# Altium PCB MSP430_PCB.PcbDoc
Units mm, origin at the board's own origin, x right, y up, seen from the top; angles counter-clockwise.
Board outline 70 x 50 mm, 2 copper layers (Top Layer, Bottom Layer), stack 1.671 mm thick; 20 components, 12 nets, 148 pads, 24 vias.
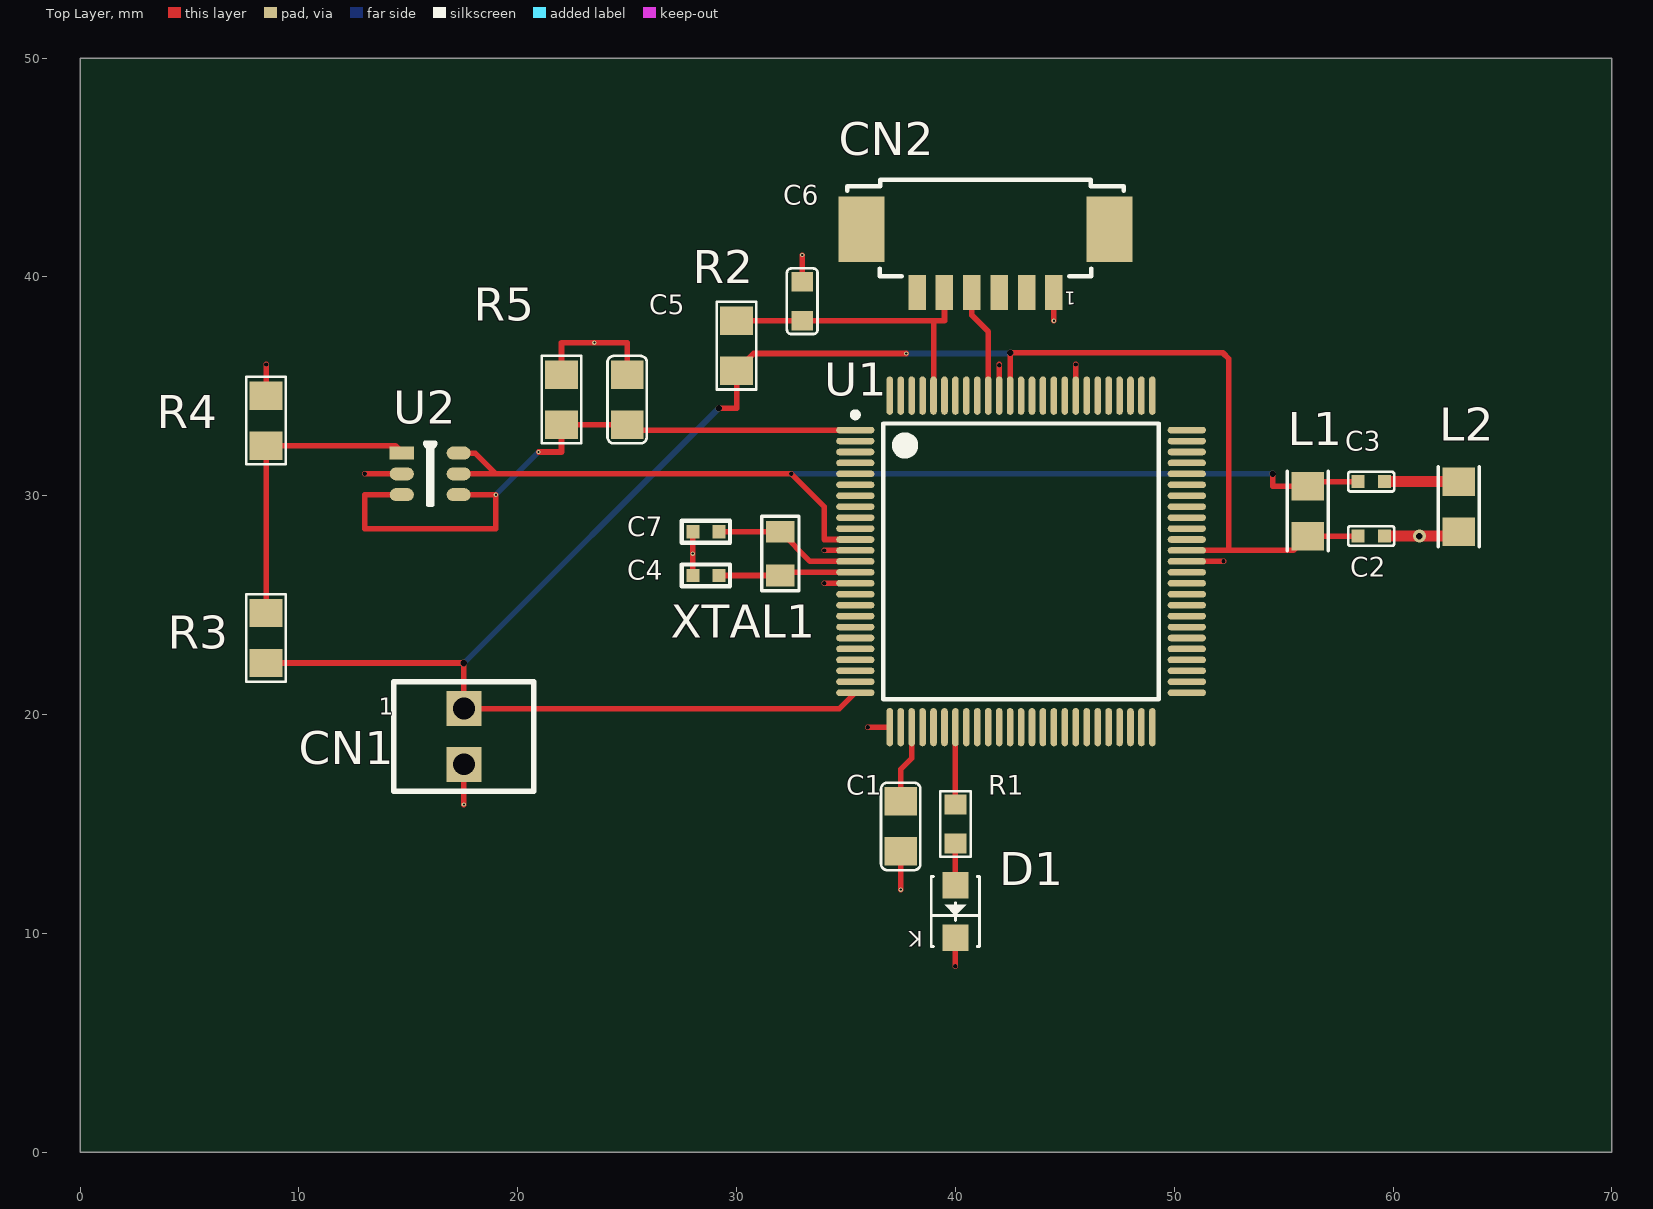
[diagram p0: Top Layer view]
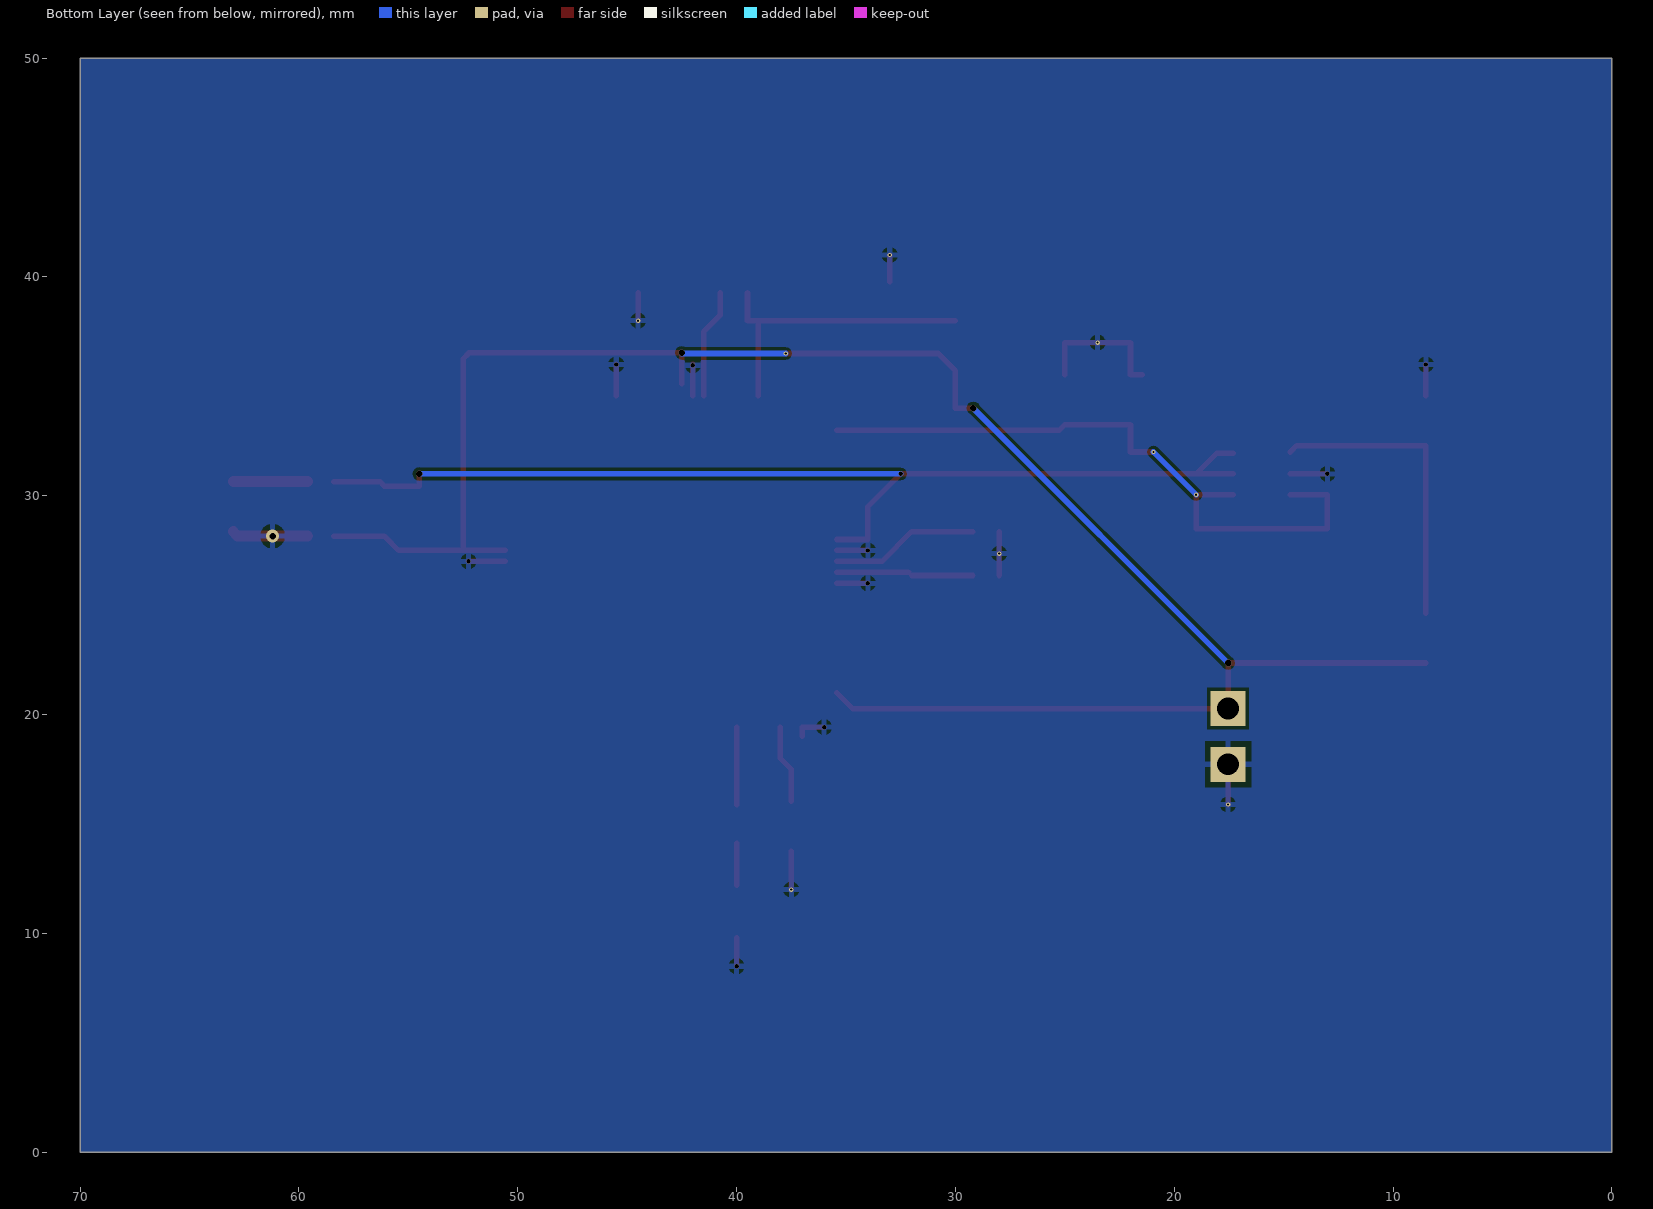
[diagram p1: Bottom Layer view, seen from below]
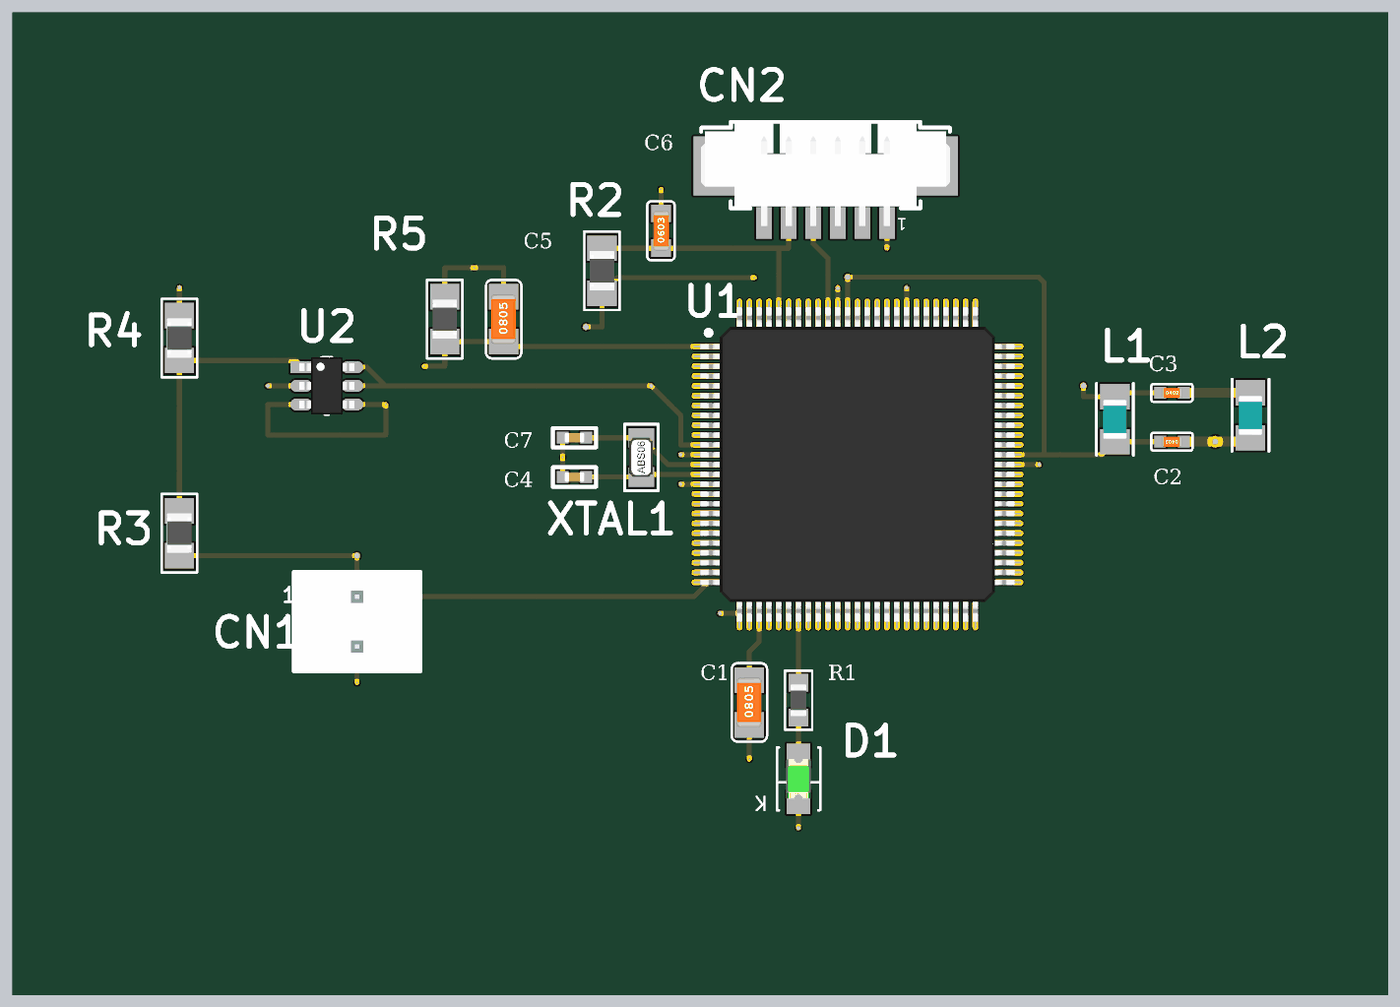
[diagram p2: 3D render of the assembled board from above, using the file's embedded part models]

## Layer stack, top to bottom
Top Solder: solder mask 0.0102, Solder Resist, Dk 3.5
Top Layer: signal copper 0.0356
Dielectric 1: dielectric 1.6, FR-4, Dk 4.8
Bottom Layer: signal copper 0.0356
Bottom Solder: solder mask 0.0102, Solder Resist, Dk 3.5

## Board outline
0,0 70,0 70,50 0,50

## Design rules (kind name [scope] priority, off if disabled: settings)
Clearance [All] p1: gap=0.15 ignorepadtopadclearanceinfootprint=FALSE
MinimumSolderMaskSliver [All] p1: minsoldermaskwidth=0.03
NetAntennae [InNet('No Net')] p1: netantennaetolerance=0
PolygonConnect [All] p1: connectstyle=Relief reliefconductorwidth=0.254 reliefentries=4 polygonreliefangle="90 Angle" airgapwidth=0.254
RoutingVias [All] p1: holewidth=0.1 width=0.2 viastyle="Through Hole" minholewidth=0.1 minwidth=0.2 maxholewidth=0.6 maxwidth=0.6
SilkToSolderMaskClearance [IsPad] p1: minsilkscreentomaskgap=0.01 clearancetoexposedcopper=TRUE
SolderMaskExpansion [All] p1: expansion=0.102
UnRoutedNet [All] p1: checkbadconnections=TRUE
Width [All] p1: maxlimit=1 minlimit=0.2 preferedwidth=0.254
26 further rules are at their usual default settings.

## Components (designator, comment, footprint, x,y, rotation, side; value= is the part's Value field where it differs from the comment)
C1 "0.47uF/50V" C0805_MD 37.5,14.889 r90 top
C2 "2.2nF" C0402_MD 59,28.157 r180 top value=Value
C3 "2.2nF" C0402_MD 59,30.643 r0 top value=Value
C4 "12pF" "Capacitor 12 pF" 28.6,26.357 r0 top
C5 "0.1uF/25V" C0805_MD 25,34.393 r90 top
C6 "1nF/16V" C0603_MD 33,38.889 r90 top
C7 "12pF" "Capacitor 12 pF" 28.6,28.357 r0 top
CN1 "Header 2" "HEADER 2M 2.54mm 180 GRAUS" 17.541,19 r270 top
CN2 "Header 6H_PicoBlade" "PICO BLADE 0532610671" 41.375,40.736 r180 top
D1 "Comment" "L0805 GREEN" 40,11 r90 top
L1 "30R@100Mhz, 3A" L0805 56.1,29.3 r90 top
L2 "30R@100Mhz, 3A" L0805 63,29.5 r90 top
R1 "330" R0603_MD 40,15 r90 top
R2 "47K" R0805_MD 30,36.857 r90 top value=Value
R3 "47K" R0805_MD 8.5,23.5 r90 top value=Value
R4 "47K" R0805_MD 8.5,33.432 r90 top value=Value
R5 "1.65K" R0805_MD 22,34.393 r270 top
U1 "Comment" PZ0100A_N 43,27 r0 top
U2 "TLV341AIDBVR" "SOT-23 6L" 16,31 r0 top
XTAL1 "32.768kHz 12.5pF" "ABS06 0805" 32,27.357 r90 top

## Footprints (in the part's own frame and the unit in brackets; to place one, negate y for a bottom-side part, rotate by r counter-clockwise, add the part's x,y. Pads: shape width x height; smd on the part's side, far side on the other; paste and mask are expansions set on the pad)
"ABS06 0805" [mm]
  rect 1x1.3 smd: 1(-1,0) 2(1,0)
  silkscreen extent -1.7,-0.85 1.7,0.85, body extent -1,-0.6 1,0.62, height 0.6
C0402_MD [mm] "Chip Capacitor, Body 1.0x0.5mm, IPC Medium Density"
  rect 0.6x0.6 smd: 1(-0.6,0) 2(0.6,0)
  silkscreen extent -1.05,-0.45 1.05,0.45, body extent -0.51,-0.25 0.51,0.25, height 0.51
C0603_MD [mm] "Chip Capacitor, Body 1.6x0.8mm, IPC Medium Density"
  rect 0.9x1 smd: 1(-0.889,0) 2(0.889,0)
  silkscreen extent -1.5,-0.7 1.5,0.7, body extent -1,-0.41 1,0.38, height 0.79
C0805_MD [mm] "Chip Capacitor, Body 2.0x1.3mm, IPC Medium Density"
  rect 1.3x1.5 smd: 1(-1.143,0) 2(1.143,0)
  silkscreen extent -2,-0.9 2,0.9, body extent -1.25,-0.61 1.25,0.64, height 0.79
"Capacitor 12 pF" [mm]
  rect 0.6x0.6 smd: 1(-0.6,0) 2(0.6,0)
  silkscreen extent -1.1,-0.5 1.1,0.5, body extent -0.5,-0.25 0.5,0.25, height 0.51
"HEADER 2M 2.54mm 180 GRAUS" [mm] "HEADER 3M 2.54mm 180 GRAUS"
  rect 1.6x1.6 hole 1: 1(-1.27,0) 2(1.27,0)
  silkscreen extent -2.5,-3.2 2.5,3.2, body extent -2.54,-3.25 2.54,3.1, height 10.68
L0805 [mm]
  rect 1.3x1.5 smd: 1(-1.143,0) 2(1.143,0)
  silkscreen extent -1.83,-0.94 1.83,0.94, body extent -1,-0.6 1,0.6, height 0.95
"L0805 GREEN" [mm]
  rect 1.2x1.2 smd paste+0: A(1.2,0) K(-1.2,0)
  silkscreen extent -1.6,-1.1 1.6,1.1, body extent -1.01,-0.62 1.01,0.63, height 1.1
"PICO BLADE 0532610671" [mm]
  rect 2.1x3 smd: 0(-5.675,-1.45) 0(5.675,-1.45)
  rect 0.8x1.6 smd: 1(-3.125,1.45) 2(-1.875,1.45) 3(-0.625,1.45) 4(0.625,1.45) 5(1.875,1.45) 6(3.125,1.45)
  silkscreen extent -6.33,-3.7 6.32,0.7, body extent -6.32,-3.6 6.33,1.6, height 3.5
PZ0100A_N [mm]
  oval 1.75x0.3 smd paste-0.102 mask+0.051: 1(-7.575,6) 2(-7.575,5.5) 3(-7.575,5) 4(-7.575,4.5) 5(-7.575,4) 6(-7.575,3.5) 7(-7.575,3) 8(-7.575,2.5) 9(-7.575,2) 10(-7.575,1.5) 11(-7.575,1) 12(-7.575,0.5) 13(-7.575,0) 14(-7.575,-0.5) 15(-7.575,-1) 16(-7.575,-1.5) 17(-7.575,-2) 18(-7.575,-2.5) 19(-7.575,-3) 20(-7.575,-3.5) 21(-7.575,-4) 22(-7.575,-4.5) 23(-7.575,-5) 24(-7.575,-5.5) 25(-7.575,-6) 51(7.575,-6) 52(7.575,-5.5) 53(7.575,-5) 54(7.575,-4.5) 55(7.575,-4) 56(7.575,-3.5) 57(7.575,-3) 58(7.575,-2.5) 59(7.575,-2) 60(7.575,-1.5) 61(7.575,-1) 62(7.575,-0.5) 63(7.575,0) 64(7.575,0.5) 65(7.575,1) 66(7.575,1.5) 67(7.575,2) 68(7.575,2.5) 69(7.575,3) 70(7.575,3.5) 71(7.575,4) 72(7.575,4.5) 73(7.575,5) 74(7.575,5.5) 75(7.575,6)
  oval 0.3x1.75 smd paste-0.102 mask+0.051: 26(-6,-7.575) 27(-5.5,-7.575) 28(-5,-7.575) 29(-4.5,-7.575) 30(-4,-7.575) 31(-3.5,-7.575) 32(-3,-7.575) 33(-2.5,-7.575) 34(-2,-7.575) 35(-1.5,-7.575) 36(-1,-7.575) 37(-0.5,-7.575) 38(0,-7.575) 39(0.5,-7.575) 40(1,-7.575) 41(1.5,-7.575) 42(2,-7.575) 43(2.5,-7.575) 44(3,-7.575) 45(3.5,-7.575) 46(4,-7.575) 47(4.5,-7.575) 48(5,-7.575) 49(5.5,-7.575) 50(6,-7.575) 76(6,7.575) 77(5.5,7.575) 78(5,7.575) 79(4.5,7.575) 80(4,7.575) 81(3.5,7.575) 82(3,7.575) 83(2.5,7.575) 84(2,7.575) 85(1.5,7.575) 86(1,7.575) 87(0.5,7.575) 88(0,7.575) 89(-0.5,7.575) 90(-1,7.575) 91(-1.5,7.575) 92(-2,7.575) 93(-2.5,7.575) 94(-3,7.575) 95(-3.5,7.575) 96(-4,7.575) 97(-4.5,7.575) 98(-5,7.575) 99(-5.5,7.575) 100(-6,7.575)
  silkscreen extent -7.7,-6.3 6.3,6.82, body extent -8,-8 8,8, height 1.46
R0603_MD [mm] "Chip Resistor, Body 1.6x0.8mm, IPC Medium Density"
  rect 0.9x1 smd: 1(-0.889,0) 2(0.889,0)
  silkscreen extent -1.5,-0.7 1.5,0.7, body extent -0.8,-0.4 0.8,0.4, height 0.37
R0805_MD [mm] "Chip Resistor, Body 2.0x1.3mm, IPC Medium Density"
  rect 1.3x1.5 smd: 1(-1.143,0) 2(1.143,0)
  silkscreen extent -2,-0.9 2,0.9, body extent -1,-0.62 1,0.63, height 0.47
"SOT-23 6L" [mm]
  rect 1.1x0.6 smd: 1(-1.3,0.95)
  oval 1.1x0.6 smd: 2(-1.3,0) 3(-1.3,-0.95) 4(1.3,-0.95) 5(1.3,0) 6(1.3,0.95)
  silkscreen extent -0.24,-1.43 0.24,1.43, body extent -1.4,-1.45 1.4,1.45, height 1.45

## Part data
C1: library part Cap_Cer_X7R_0.47uF_50V_0805, "CAP CER 0.47UF 50V 10% X7R 0805", Partnumber=C0805C474K5RACTU, NCM=8532.24.10
C2 C3: library part "Cap 2.2nF/16V_0402", "Imported", Case/Package=0402, Case Code (Metric)=1005, Dielectric=X7R, Manufacturer=Murata, Manufacturer_Part_Number=GRM155R71C222KA01D, Max Operating Temperature=125°C, Min Operating Temperature=-55°C, Package Quantity=10000, Supplier Part Number 1=490-6330-1-ND, Tolerance=10%, Voltage Rating=16V, Built_By=EMA_UL_Team, C="Copyright (C) 2015 Accelerated Designs. All rights reserved", Capacitance=2.2nF, Case Code (Imperial)=0402, ComponentLink1Description=https://datasheet.ciiva.com/5412/product-5412216.pdf, ComponentLink1URL=https://datasheet.ciiva.com/5412/product-5412216.pdf, ComponentLink2Description=https://datasheet.ciiva.com/6263/partnumbering-e-01-6263624.pdf, ComponentLink2URL=https://datasheet.ciiva.com/6263/partnumbering-e-01-6263624.pdf, ComponentLink3Description=https://datasheet.ciiva.com/6263/partnumbering-e-01-6263627.pdf, ComponentLink3URL=https://datasheet.ciiva.com/6263/partnumbering-e-01-6263627.pdf, ComponentLink4Description=https://datasheet.ciiva.com/17453/product-17453067.pdf, ComponentLink4URL=https://datasheet.ciiva.com/17453/product-17453067.pdf, ComponentLink5Description=https://datasheet.ciiva.com/11620/product-11620860.pdf, ComponentLink5URL=https://datasheet.ciiva.com/11620/product-11620860.pdf, ComponentLink6Description=https://datasheet.ciiva.com/6263/partnumbering-e-01-6263630.pdf, ComponentLink6URL=https://datasheet.ciiva.com/6263/partnumbering-e-01-6263630.pdf, Depth=0.5mm, Height=0.5mm, Lead Free="Lead Free", Length=1mm, Manufacturer Part Number=GRM155R71C222KA01D, Mount="Surface Mount", Packaging="Tape and Reel", Pricing 1="1=0.1, 10=0.03, 100=0.0134, 500=0.0096, 1000=0.0075, 2500=0.0068, 5000=0.0063 (USD)", Radiation Hardening=No, RefDes=RefDes, Stock 1=125973, Supplier 1=Digi-Key, Termination=SMD/SMT, Thickness=0.022inch, Type=DEV, Vendor=Murata, Voltage Rating (DC)=16V, Width=0.02inch
C4 C7: library part "Capacitor 12pF", "Multilayer Ceramic Capacitors MLCC - SMD/SMT 0402 12pF 200V C0G 5% HI FREQ", Case/Package=0402, Case Code (Metric)=1005, Dielectric=C0G, Manufacturer="Vishay Vitramon", Manufacturer Part Number=VJ0402D120JXCAJ, Max Operating Temperature=125°C, Min Operating Temperature=-55°C, Package Quantity=1, Supplier Part Number 1=720-1278-2-ND, Temperature Coefficient=30ppm/°C, Tolerance=5%, Voltage=200V, Capacitance=12pF, Case Code (Imperial)=0402, Category=Capacitors, ComponentLink1Description=http://www1.futureelectronics.com/doc/VISHAY/VJ0402DSeries.pdf?src-supplier=Future+Electronics, ComponentLink1URL=http://www1.futureelectronics.com/doc/VISHAY/VJ0402DSeries.pdf?src-supplier=Future+Electronics, ComponentLink2Description=http://www.vishay.com/docs/45071/vjhifreq.pdf?src-supplier=Digi-Key, ComponentLink2URL=http://www.vishay.com/docs/45071/vjhifreq.pdf?src-supplier=Digi-Key, ComponentLink3Description=http://www.farnell.com/datasheets/2050006.pdf?src-supplier=Element14, ComponentLink3URL=http://www.farnell.com/datasheets/2050006.pdf?src-supplier=Element14, ComponentLink4Description=http://www.farnell.com/datasheets/1631376.pdf?src-supplier=Element14, ComponentLink4URL=http://www.farnell.com/datasheets/1631376.pdf?src-supplier=Element14, Depth=0.51mm, Height=0.61mm, Lead Free="Lead Free", Length=1.02mm, Mount="Surface Mount", Packaging="Tape and Reel", Pricing 1="1000=0.13129, 2000=0.12357 (USD)", Radiation Hardening=No, REACH SVHC=Unknown, Stock 1=2000, Supplier 1=Digi-Key, Termination=SMD/SMT, Thickness=0.024inch, Voltage Rating=200V, Voltage Rating (DC)=200V, Width=0.02inch
C5: library part Cap_Cer_X7R_0.1uF_25V_0805, "CAP CER 0.1UF 25V 10% X7R 0805", Partnumber=CC0805KRX7R8BB104, NCM=8532.24.10
C6: library part Cap_Cer_X7R_1nF_16V_0603, "CAP CER 1nF 16V 0603 5%", Partnumber=C0603X102J4RECAUTO, NCM=8532.24.10
CN1: "Header, 2-Pin", Partnumber=826646-2, LatestRevisionDate=17-Jul-2002, LatestRevisionNote="Re-released for DXP Platform.", Publisher="Altium Limited"
CN2: "Header, 6-Pin, Right Angle", Partnumber=53398-0671, LatestRevisionDate=17-Jul-2002, LatestRevisionNote="Re-released for DXP Platform.", Publisher="Altium Limited"
L1 L2: library part FB_30R_3A_100MHz_0805, "Ferrite Bead 30 OHM 3A 100MHz", Partnumber=BLM21PG300SN1D, NCM=8504.50.00
R1: library part "Resistor 330", Case/Package=0603, Case Code (Metric)=1608, Manufacturer=Vishay, Manufacturer Part Number=CRCW0603330RFKEAHP, Max Operating Temperature=155°C, Max Power Dissipation=250mW, Min Operating Temperature=-55°C, Package Quantity=1, Resistance=330R, Supplier Part Number 1=541-330SCT-ND, Temperature Coefficient=100ppm/°C, Tolerance=1%, Voltage Rating=75V, Case Code (Imperial)=0603, ComponentLink1Description=https://datasheet.ciiva.com/48524/crcwhpe3-48524918.pdf, ComponentLink1URL=https://datasheet.ciiva.com/48524/crcwhpe3-48524918.pdf, ComponentLink2Description=https://datasheet.ciiva.com/8944/crcwhpe3-8944983.pdf, ComponentLink2URL=https://datasheet.ciiva.com/8944/crcwhpe3-8944983.pdf, ComponentLink3Description=https://datasheet.ciiva.com/6551/crcwhpe3-6551640.pdf, ComponentLink3URL=https://datasheet.ciiva.com/6551/crcwhpe3-6551640.pdf, ComponentLink4Description=https://datasheet.ciiva.com/6551/crcwhpe3-6551641.pdf, ComponentLink4URL=https://datasheet.ciiva.com/6551/crcwhpe3-6551641.pdf, ComponentLink5Description=https://datasheet.ciiva.com/6551/crcwhpe3-6551644.pdf, ComponentLink5URL=https://datasheet.ciiva.com/6551/crcwhpe3-6551644.pdf, ComponentLink6Description=https://datasheet.ciiva.com/16884/crcwhpe3-16884876.pdf, ComponentLink6URL=https://datasheet.ciiva.com/16884/crcwhpe3-16884876.pdf, ComponentLink7Description=https://datasheet.ciiva.com/12664/crcwhpe3-46056-12664527.pdf, ComponentLink7URL=https://datasheet.ciiva.com/12664/crcwhpe3-46056-12664527.pdf, Composition="Thick Film", Contact Plating=Tin, Depth=0.85mm, Height=0.45mm, Lead Free="Lead Free", Length=1.6mm, Military Standard=Not, Mount="Surface Mount", Number of Terminations=2, Packaging="Tape and Reel", Power Rating=250mW, Pricing 1="1=0.18, 10=0.156, 100=0.0609, 1000=0.0255, 2500=0.0234 (USD)", Radiation Hardening=No, REACH SVHC=Unknown, Stock 1=0, Supplier 1=Digi-Key, Termination=SMD/SMT, Voltage Rating (DC)=75V, Weight=7.1E-05oz, Width=0.033inch
R2 R3 R4: library part "Resistor 47 Kohms", "Imported", Case/Package=0805, Case Code (Metric)=2012, Manufacturer="Panasonic ECG", Manufacturer_Part_Number=ERA-6AEB473V, Max Operating Temperature=155°C, Max Power Dissipation=125mW, Min Operating Temperature=-55°C, Package Quantity=1, Resistance=47kR, Supplier Part Number 1=P47KDACT-ND, Temperature Coefficient=25ppm/°C, Tolerance=0.1%, Voltage Rating=100V, Built_By=EMA_UL_Team, C="Copyright (C) 2015 Accelerated Designs. All rights reserved", Case Code (Imperial)=0805, ComponentLink1Description=https://datasheet.ciiva.com/6138/485442-6138021.pdf, ComponentLink1URL=https://datasheet.ciiva.com/6138/485442-6138021.pdf, ComponentLink2Description=https://datasheet.ciiva.com/16759/70068849-16759926.pdf, ComponentLink2URL=https://datasheet.ciiva.com/16759/70068849-16759926.pdf, ComponentLink3Description=https://datasheet.ciiva.com/22740/485442-22740326.pdf, ComponentLink3URL=https://datasheet.ciiva.com/22740/485442-22740326.pdf, ComponentLink4Description=https://datasheet.ciiva.com/30061/54aoa0000ce26-30061799.pdf, ComponentLink4URL=https://datasheet.ciiva.com/30061/54aoa0000ce26-30061799.pdf, ComponentLink5Description=https://datasheet.ciiva.com/11812/0900766b80beefcc-11812472.pdf, ComponentLink5URL=https://datasheet.ciiva.com/11812/0900766b80beefcc-11812472.pdf, ComponentLink6Description=https://datasheet.ciiva.com/7802/485442-7802329.pdf, ComponentLink6URL=https://datasheet.ciiva.com/7802/485442-7802329.pdf, ComponentLink7Description=https://datasheet.ciiva.com/16774/70068849-16774537.pdf, ComponentLink7URL=https://datasheet.ciiva.com/16774/70068849-16774537.pdf, ComponentLink8Description=https://datasheet.ciiva.com/48425/era-eng-tds-48425610.pdf, ComponentLink8URL=https://datasheet.ciiva.com/48425/era-eng-tds-48425610.pdf, ComponentLink9Description=https://datasheet.ciiva.com/17209/aoa0000ce26-17209676.pdf, ComponentLink9URL=https://datasheet.ciiva.com/17209/aoa0000ce26-17209676.pdf, ComponentLink10Description=https://datasheet.ciiva.com/43455/485442-43455277.pdf, ComponentLink10URL=https://datasheet.ciiva.com/43455/485442-43455277.pdf, ComponentLink11Description=https://datasheet.ciiva.com/48530/era-eng-tds-48530030.pdf, ComponentLink11URL=https://datasheet.ciiva.com/48530/era-eng-tds-48530030.pdf, ComponentLink12Description=https://datasheet.ciiva.com/26335/453548-da-01-en-widerstand-0805-era-26335717.pdf, ComponentLink12URL=https://datasheet.ciiva.com/26335/453548-da-01-en-widerstand-0805-era-26335717.pdf, Composition="Metal Film,Thin Film", Contact Plating=Tin, Depth=1.25mm, Height=0.5mm, Lead Free="Lead Free", Length=2mm, Manufacturer Part Number=ERA-6AEB473V, Military Standard=Not, Mount="Surface Mount", Number of Pins=2, Number of Terminations=2, Packaging="Tape and Reel", Power Rating=125mW, Pricing 1="1=0.36, 10=0.302, 100=0.1182, 1000=0.0495, 2500=0.0454 (USD)", Radiation Hardening=No, REACH SVHC="No SVHC", RefDes=RefDes, Stock 1=186891, Supplier 1=Digi-Key, Termination=SMD/SMT, Type=DEV, Vendor=Panasonic, Voltage Rating (DC)=100V, Weight=0.000194oz, Width=1.25mm
R5: library part R1.65K_1%_1/10W_0805, "RES 1.65K OHM 1/10W 0.1% 0805", Partnumber=PCF0805R-1K65BT1, NCM=8533.21.20
U2: Supplier Part Number 1=296-17680-6-ND, Partnumber=TLV341AIDBVR, Supplier 1=Digi-Key
XTAL1: library part Xtal_32.768kHz_12pF_2_SMD, "32.768kHz ±20ppm Crystal 12.5pF 70 kOhm -40°C ~ 125°C", Partnumber=ECS-.327-12.5-34S-TR, NCM=8541.60.10

## Via types
v1: diameter 0.2, hole 0.2, Top Layer to Bottom Layer, 10 vias
v2: diameter 0.2, hole 0.1, Top Layer to Bottom Layer, 9 vias
v3: diameter 0.3, hole 0.3, Top Layer to Bottom Layer, 4 vias
v4: diameter 0.6, hole 0.3, Top Layer to Bottom Layer, 1 vias

## Nets (pads, with @x,y where several pads share a name; then routed paths per layer and width w, separated by ;. In a path a pad name is that pad's centre, name@x,y a point inside that pad or via, vN(x,y) a via of type N, cw(c..) or ccw(c..) an arc to the next point about the centre after c; other vN are vias at no path point)
AGND: C3.2 L2.2 | length 3.4
  Top Layer w0.5: C3.2 L2.2
GND: C1.1 C2.1 C4.1 C5.2 C6.2 C7.1 CN1.2 CN2.1 D1.K L2.1 R4.2 R5.1 U1.12 U1.15 U1.26 U1.63 U1.83 U1.90 U2.2 | length 30.8
  Top Layer w0.254: R4.2 v1(8.5,36) ; v1(13,31) U2.2 ; v2(17.541,15.889) CN1.2 ; R5.1@21.464,35.536 R5.1 22,37 v2(23.5,37) 25,37 C5.2 ; C4.1 v2(28,27.357) C7.1 ; C6.2 v2(33,41) ; v1(34,26) U1.15 ; v1(34,27.5) U1.12 ; v1(36,19.425) U1.26 ; v2(37.5,12) C1.1 ; v1(40,8.5) D1.K ; U1.90 v1(42,35.964) v1@42,36 ; v2(44.5,38) CN2.1 ; U1.83 v1(45.5,36) ; U1.63 v1(52.252,27)
  Top Layer w0.5: C2.1 v4(61.2,28.157) 62.8,28.157 L2.1
JTAG_TCK: CN2.4 U1.91 | length 5
  Top Layer w0.254: CN2.4 40.75,38.25 41.5,37.5 U1.91
JTAG_TDO_TDI: C6.1 CN2.5 R2.2 U1.96 | length 14.2
  Top Layer w0.254: R2.2 C6.1 39,38 ; U1.96 39,38 ; CN2.5 39.5,38 39,38
NetC1_2: C1.2 U1.28 | length 3.6
  Top Layer w0.254: C1.2 37.5,17.5 38,18 U1.28
NetR2_2: R3.2 R4.1 U2.1 | length 14
  Top Layer w0.254: R3.2 R4.1 14.411,32.289 U2.1@14.7,32
OBDH_AVCC: C3.1 L1.2 U1.11 U2.5 U2.6 | length 48.9
  Top Layer w0.254: U2.5 19,31 ; U2.6 18.05,31.95 19,31 ; U1.11 34,28 34,29.5 v1(32.5,31) 19,31 ; v3(54.5,31) 54.5,30.443 L1.2 56.3,30.643 C3.1
  Bottom Layer w0.254: v1(32.5,31) v3(54.5,31)
OBDH_DVCC: C2.2 CN1.1 L1.1 R2.1 R3.1 U1.25 U1.64 U1.89 | length 89.5
  Top Layer w0.254: R3.1 v3(17.541,22.357) CN1.1 34.695,20.27 U1.25 ; v3(29.184,34) 30,34 R2.1 30.786,36.5 v2(37.755,36.5) ; U1.89@42.5,35.111 v3(42.5,36.536) 52.216,36.536 52.5,36.252 52.5,27.5 ; U1.64 52.5,27.5 ; C2.2 L1.1 55.443,27.5 52.5,27.5
  Bottom Layer w0.254: v3(17.541,22.357) v3(29.184,34) ; v2(37.755,36.5) v3@42.5,36.5
OBDH_VOLTAGE_ADC: C5.1 R5.2 U1.1 U2.3 U2.4 | length 31.1
  Top Layer w0.254: U2.3 13,30.05 13,28.5 19,28.5 v2(19,30.05) U2.4 ; v2(20.95,32) 22,32 R5.2 C5.1 25.25,33 U1.1
  Bottom Layer w0.254: v2(19,30.05) v2(20.95,32)
SYSTEM_LED: R1.2 U1.32 | length 3.5
  Top Layer w0.254: R1.2 U1.32
XT1IN: C4.2 U1.14 XTAL1.1 | length 6.1
  Top Layer w0.254: C4.2 XTAL1.1 ; XTAL1.1@32.143,26.5 U1.14
XT1OUT: C7.2 U1.13 XTAL1.2 | length 6.8
  Top Layer w0.254: C7.2 XTAL1.2 33.357,27 U1.13
pads on no net: CN2.0 CN2.2 CN2.3 CN2.6 D1.A R1.1 U1.2 U1.3 U1.4 U1.5 U1.6 U1.7 U1.8 U1.9 U1.10 U1.16 U1.17 U1.18 U1.19 U1.20 U1.21 U1.22 U1.23 U1.24 U1.27 U1.29 U1.30 U1.31 U1.33 U1.34 U1.35 U1.36 U1.37 U1.38 U1.39 U1.40 U1.41 U1.42 U1.43 U1.44 U1.45 U1.46 U1.47 U1.48 U1.49 U1.50 U1.51 U1.52 U1.53 U1.54 U1.55 U1.56 U1.57 U1.58 U1.59 U1.60 U1.61 U1.62 U1.65 U1.66 U1.67 U1.68 U1.69 U1.70 U1.71 U1.72 U1.73 U1.74 U1.75 U1.76 U1.77 U1.78 U1.79 U1.80 U1.81 U1.82 U1.84 U1.85 U1.86 U1.87 U1.88 U1.92 U1.93 U1.94 U1.95 U1.97 U1.98 U1.99 U1.100
copper on no net: | length 2.8
  Top Layer w0.254: 37,19 37,19.425 ; 40,12.2 40,14.111 ; 40,18.925 40,19.425

## Polygon pours and split planes (outlines as drawn)
GND on Bottom Layer "GND-BACK" (solid, pour order 11): 82.5,2.5
GND on Bottom Layer "Bottom Layer-No Net 1" (solid, pour order 7): 0,50 70,50 70,0 0,0

## Text inside footprints (layer, text, board x,y; h text height)
CN1: Top Overlay "1" at 13.641,20 h0.76
CN2: Top Overlay "1" at 45.5,39.536 h1 r180
D1: Top Overlay "K" at 38.5,10.1 h0.7 r180